# EAGLE board 7-Segment display (EAGLE 9.7.0)

Size 149.89 x 101.43 mm. Coordinates in mm from the lower left corner, seen from the top.
Outline: 0,0 149.89,0 149.89,101.43 0,101.43 0,0
Copper layers (1*16): Top 0.035mm / dielectric 1.5mm / Bottom 0.035mm
Design rules "default": minimum track width 6mil, minimum drill 0.35mm, track to track 6mil, track to pad 6mil, pad to pad 6mil, via to via 6mil, smd to smd 6mil, copper to edge 40mil, drill to drill 6mil, minimum pad ring 10mil, minimum via ring 8mil, stop-mask expansion 4mil, vias tented up to drill 0mil, thermal gap 10mil

## Footprints (pad centres in the part's own frame; a part is rotated, then mirrored left to right if it is on the bottom)
7SEG-13 = drill 0.813 long: 1 -5.08,-7.62; 2 -2.54,-7.62; 3 0,-7.62; 4 2.54,-7.62; 5 5.08,-7.62; 6 5.08,7.62; 7 2.54,7.62; 8 0,7.62; 9 -2.54,7.62; 10 -5.08,7.62
BATTERY-GENERIC = drill 1.118 pad 3.15 octagon: + 2.54,0; - -2.54,0
RESAD1016W63L850D250B = drill 0.83 pad 1.43: 1 -5.08,0; 2 5.08,0
DIP762W53P254L1969H508Q14B = drill 0.743 pad 1.343: 1 -3.81,7.62; 2 -3.81,5.08; 3 -3.81,2.54; 4 -3.81,0; 5 -3.81,-2.54; 6 -3.81,-5.08; 7 -3.81,-7.62; 8 3.81,-7.62; 9 3.81,-5.08; 10 3.81,-2.54; 11 3.81,0; 12 3.81,2.54; 13 3.81,5.08; 14 3.81,7.62
DIP762W53P254L1969H508Q16B = drill 0.743 pad 1.343: 1 -3.81,8.89; 2 -3.81,6.35; 3 -3.81,3.81; 4 -3.81,1.27; 5 -3.81,-1.27; 6 -3.81,-3.81; 7 -3.81,-6.35; 8 -3.81,-8.89; 9 3.81,-8.89; 10 3.81,-6.35; 11 3.81,-3.81; 12 3.81,-1.27; 13 3.81,1.27; 14 3.81,3.81; 15 3.81,6.35; 16 3.81,8.89

## Placement (x,y rotation side)
DIGIT1  7SEG-CK  [7SEG-13]  140.62,14.1 0 top
P1  BATTERYGENERIC  [BATTERY-GENERIC]  8.26,80.6 180 top
R1  1k  [RESAD1016W63L850D250B]  87.8,56.9 90 top
R2  220  [RESAD1016W63L850D250B]  136.06,92.46 90 top
R3  1  [RESAD1016W63L850D250B]  87.8,82.3 90 top
U1  74HC93_PDIP  [DIP762W53P254L1969H508Q14B]  110.66,73.41 90 top
U2  CD4511_PDIP  [DIP762W53P254L1969H508Q16B]  132.25,73.41 90 top

## Library data of the parts
DIGIT1 = Tinkercad; CATEGORY: Opto-Electronic; SUB-CATEGORY: Display; TYPE: 7-Segment
P1 R1-R3 U1 U2 = Tinkercad

## Nets
P1+: P1.+ R1.2 R3.1 R3.2 U1.5 U1.14 U2.3 U2.4 U2.16
P1-: P1.- R1.1 R2.2 U1.2 U1.3 U1.10 U2.5 U2.8
U1_!CP1: U1.1 U1.12 U2.7
U1_Q1: U1.9 U2.1
U1_Q2: U1.8 U2.2
U1_Q3: U1.11 U2.6
U2_A: DIGIT1.7 U2.13
U2_B: DIGIT1.6 U2.12
U2_C: DIGIT1.4 DIGIT1.8 R2.1 U2.11
U2_D: DIGIT1.2 U2.10
U2_E: DIGIT1.1 U2.9
U2_F: DIGIT1.9 U2.15
U2_G: DIGIT1.10 U2.14

## Tracks (layer width: path | path; a pad name or v marks a point on that pad's centre or on a via)
P1+  (8 unrouted)
P1-  (7 unrouted)
U1_!CP1  (2 unrouted)
U1_Q1  (1 unrouted)
U1_Q2  (1 unrouted)
U1_Q3  (1 unrouted)
U2_A  (1 unrouted)
U2_B  (1 unrouted)
U2_C  (3 unrouted)
U2_D  (1 unrouted)
U2_E  (1 unrouted)
U2_F  (1 unrouted)
U2_G  (1 unrouted)